# Altium PCB Satellite2.PcbDoc
Units mil, origin at the board's own origin, x right, y up, seen from the top; angles counter-clockwise.
Board outline 3725 x 3550 mil, 2 copper layers (Top Layer, Bottom Layer); 65 components, 69 nets, 239 pads, 118 vias.
Unrouted connection lines stored in the file: 15.
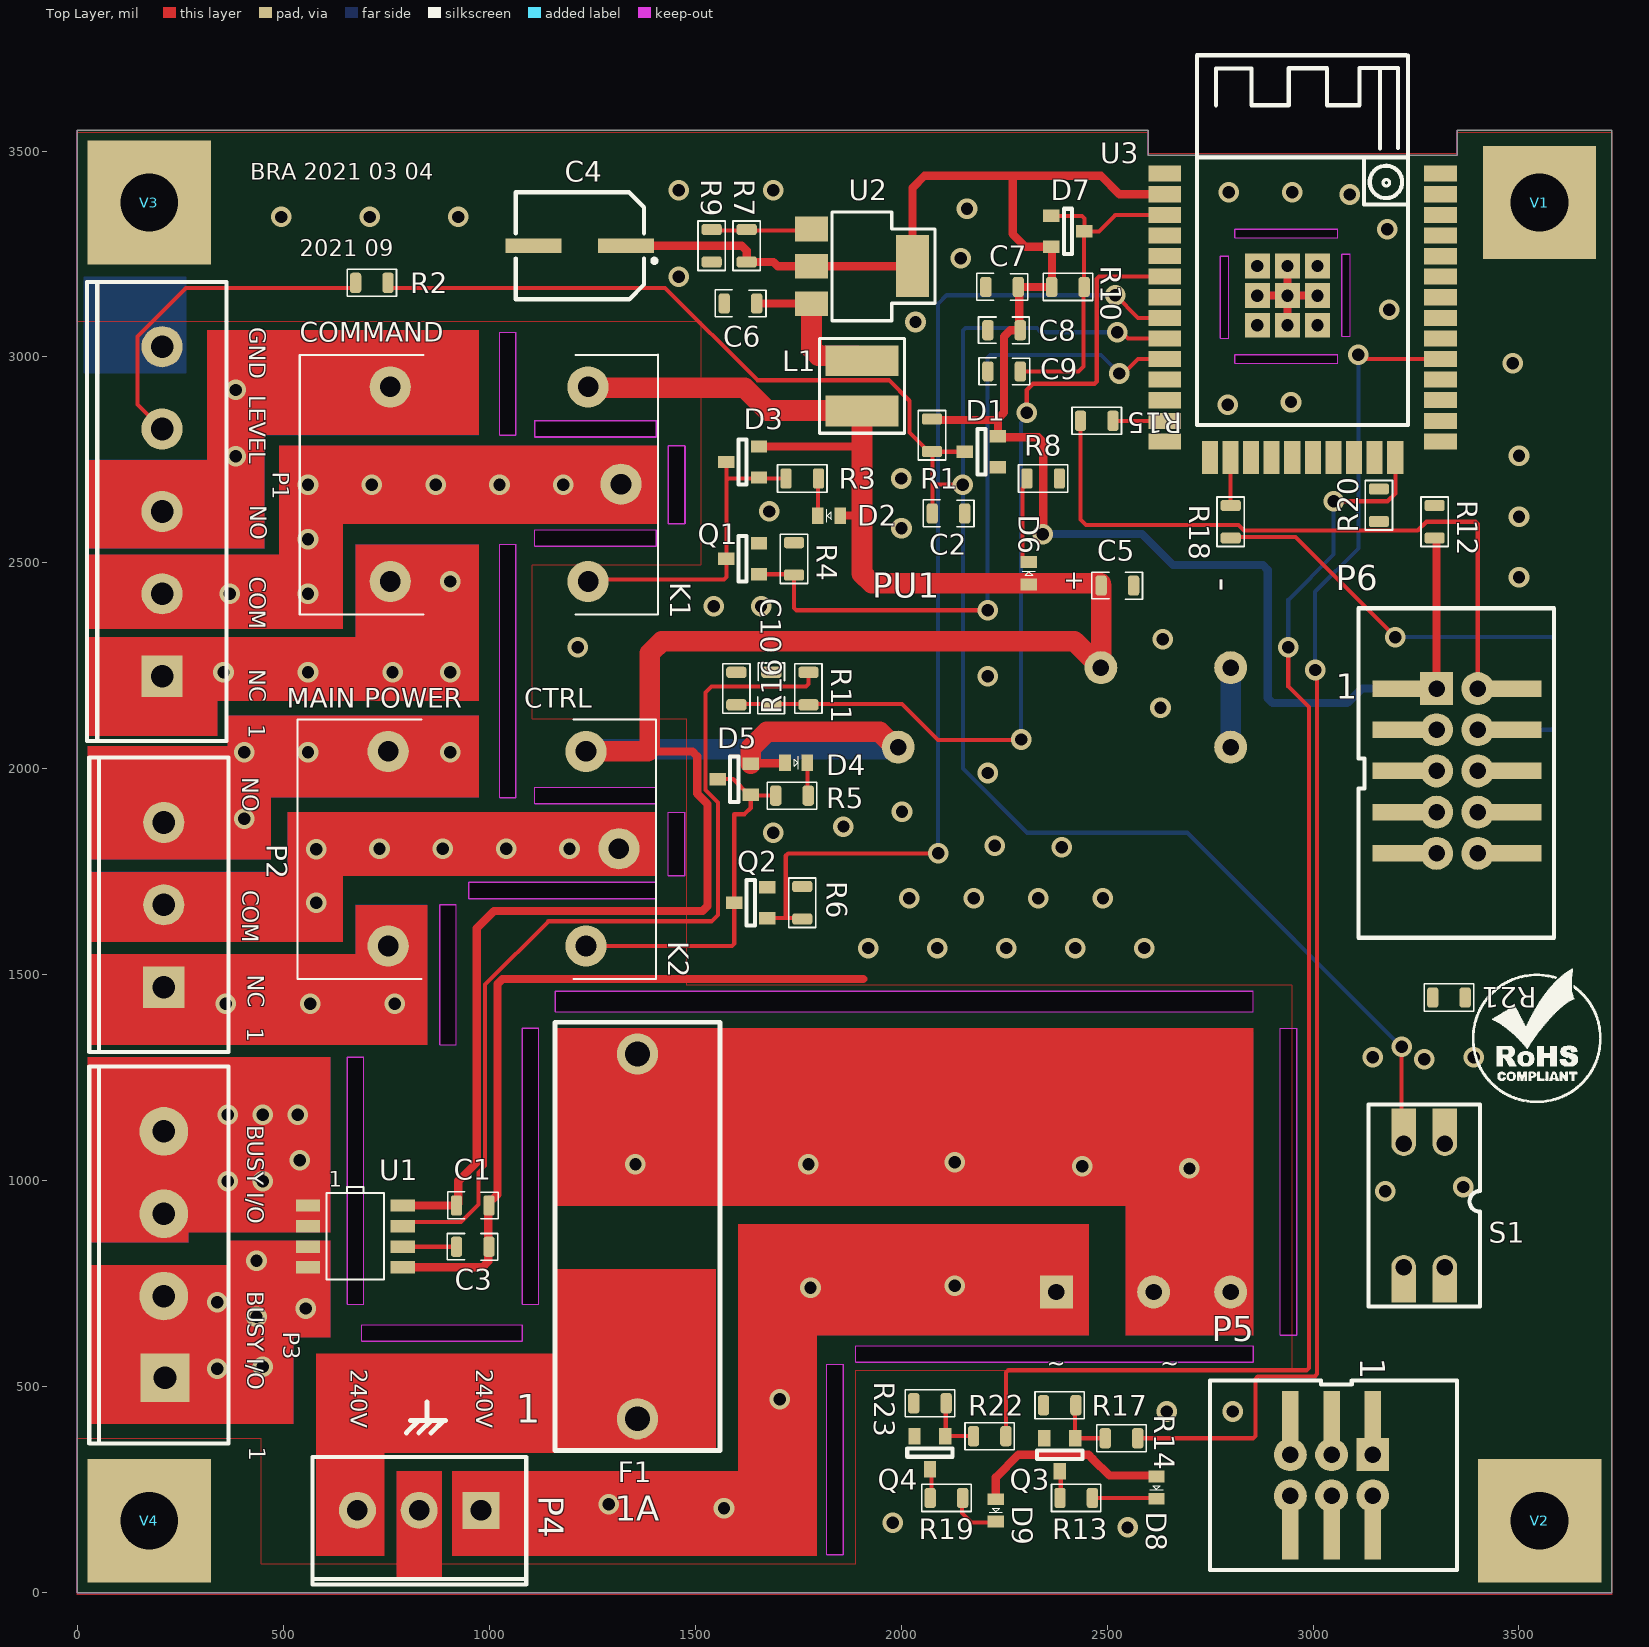
[diagram p0: Top Layer view]
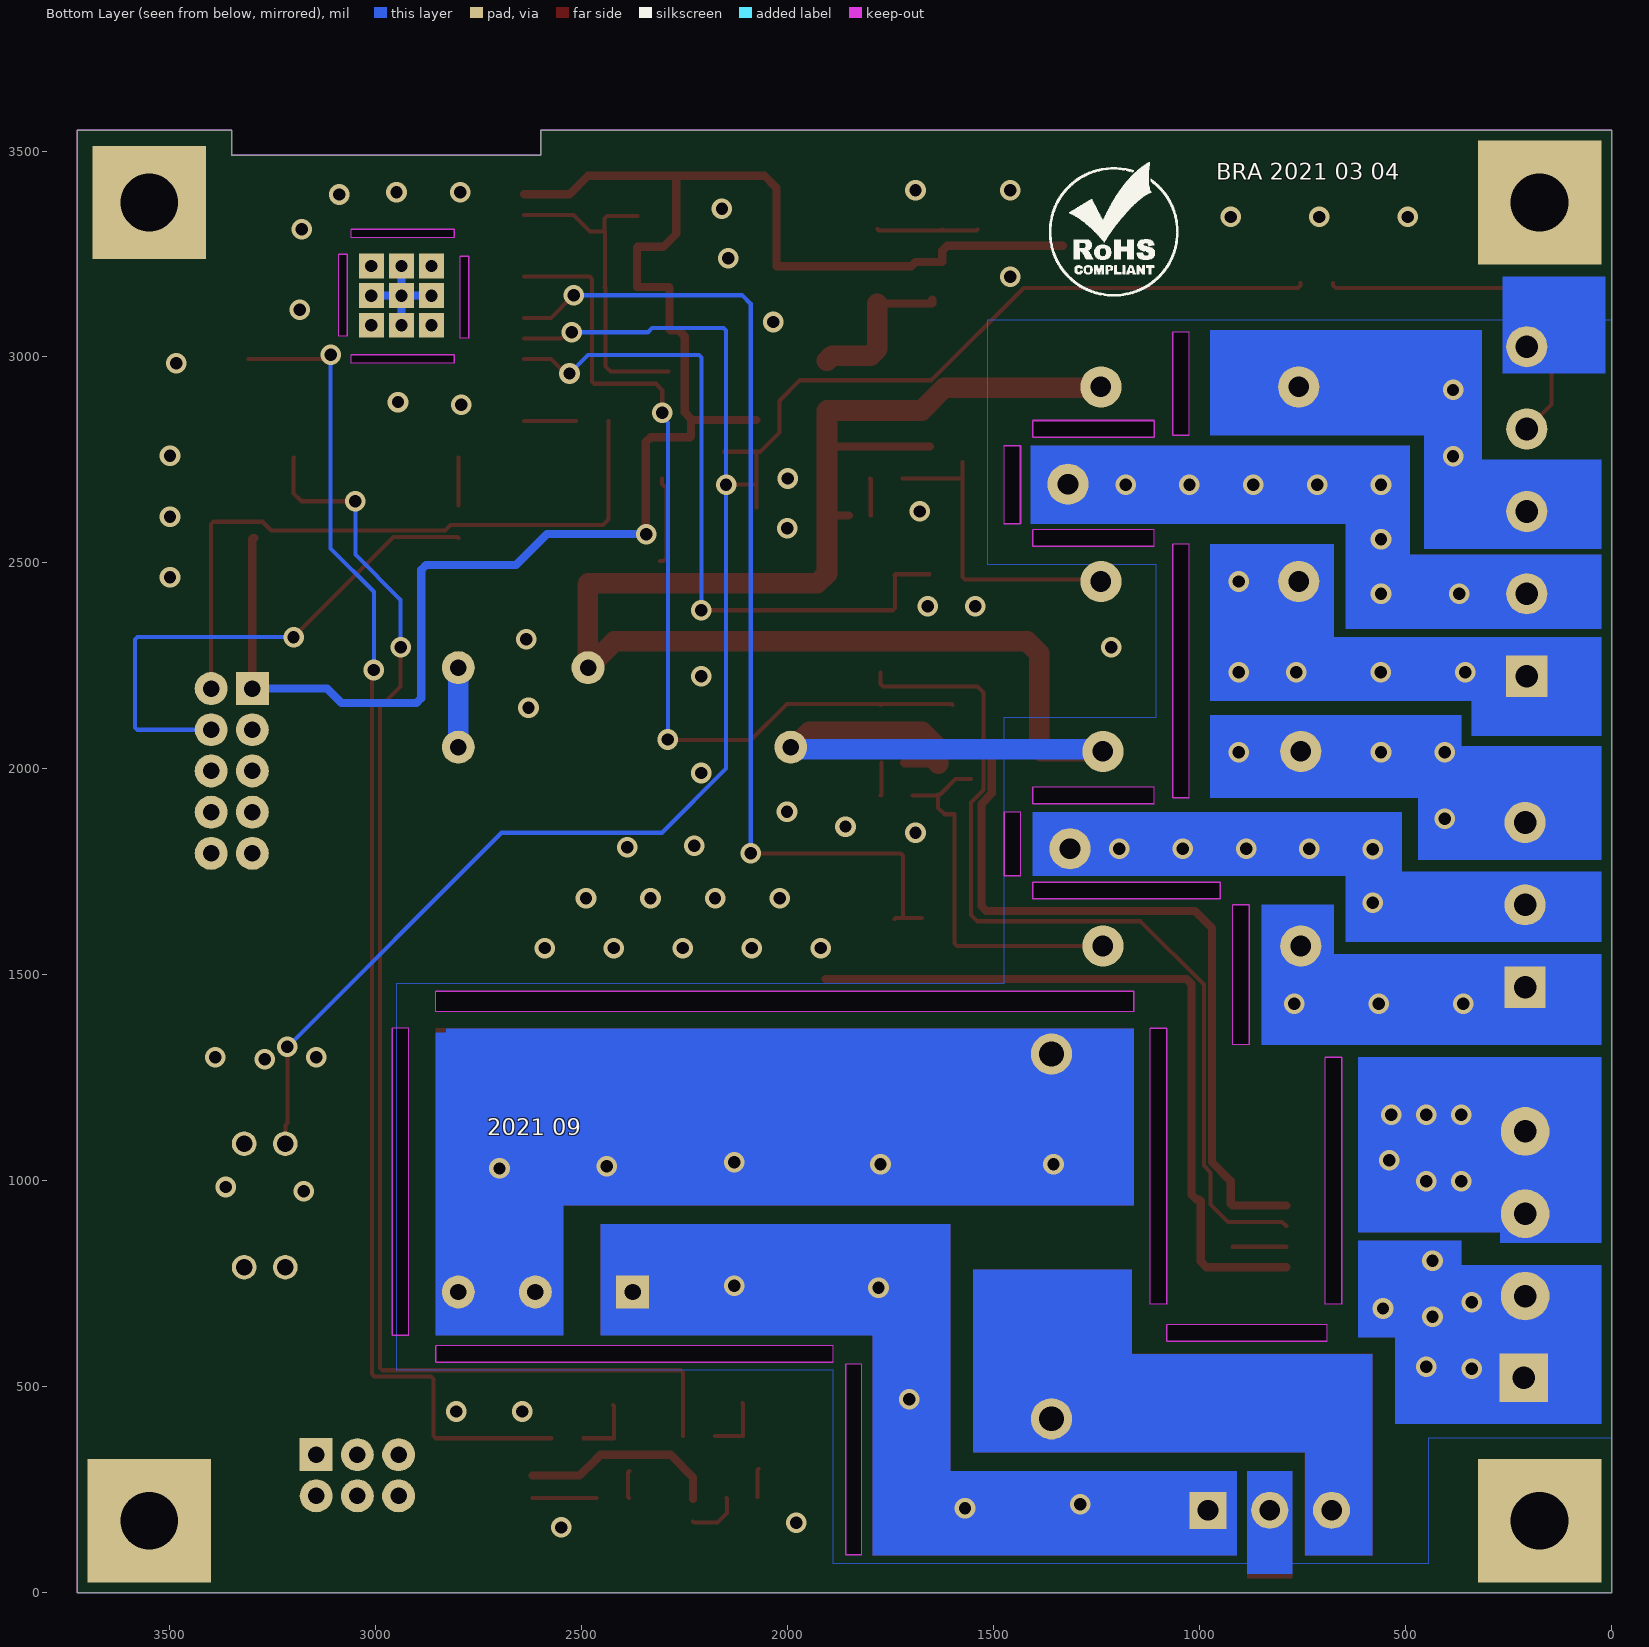
[diagram p1: Bottom Layer view, seen from below]
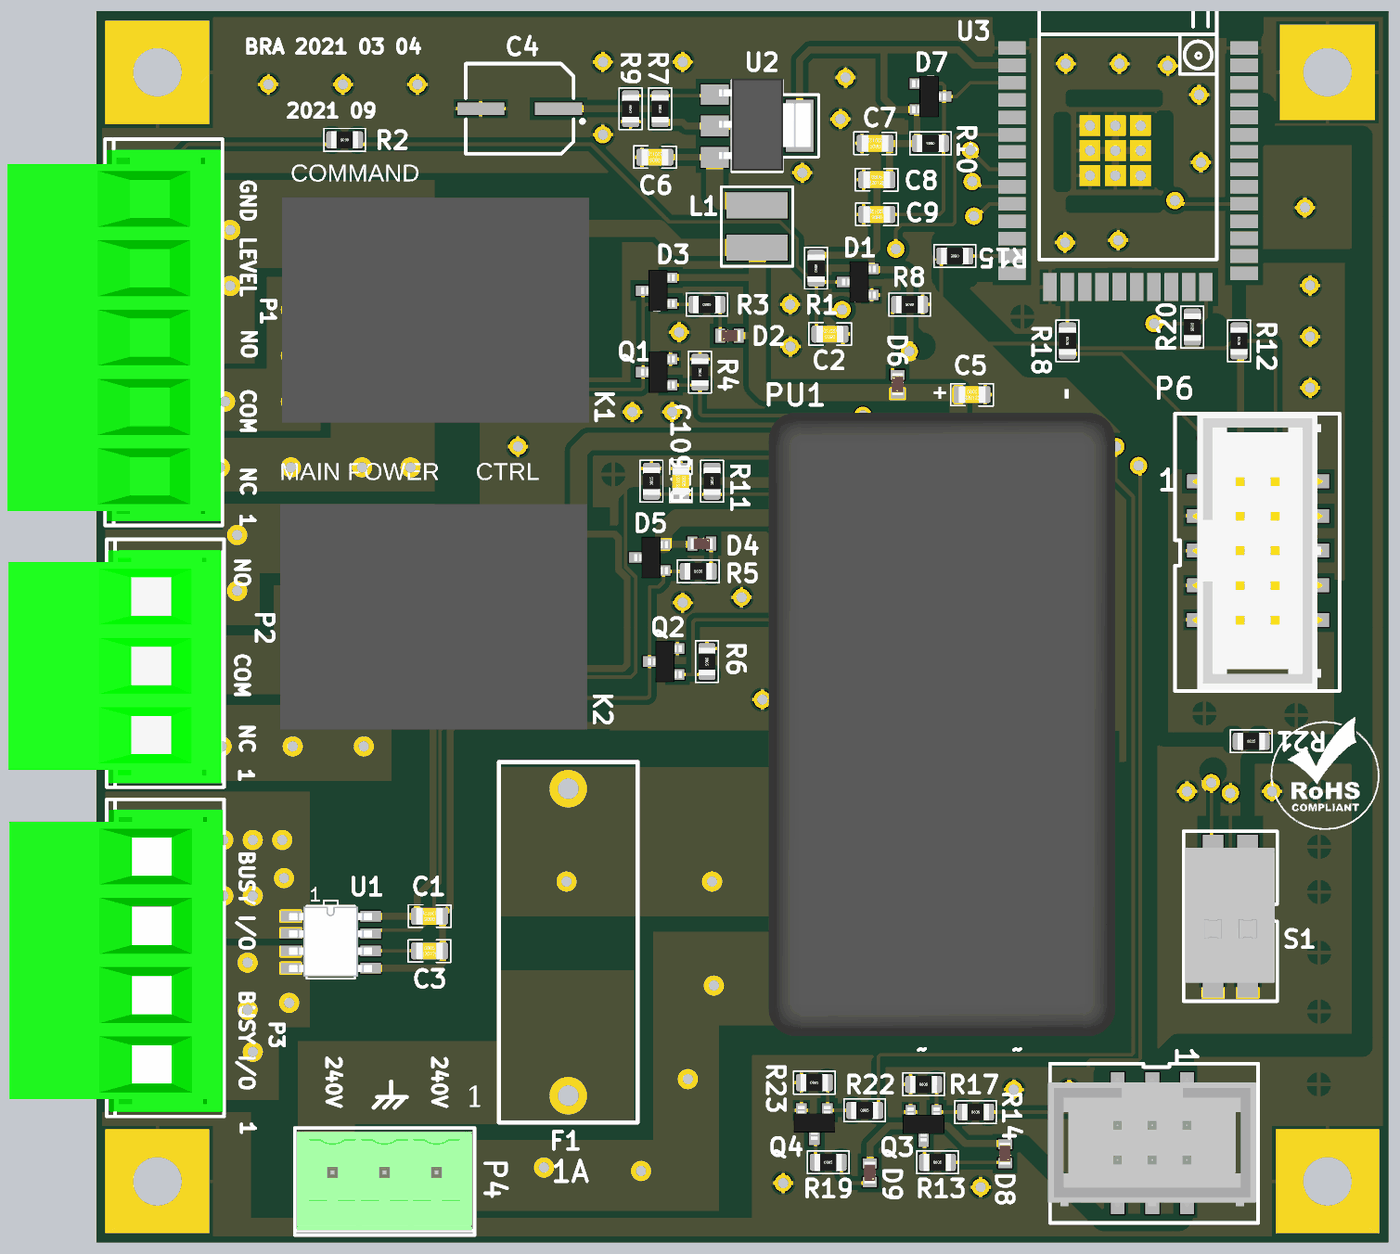
[diagram p2: 3D render of the assembled board from above, using the file's embedded part models]

## Layer stack, top to bottom
Top Solder: solder mask 0.4, Solder Resist, Dk 3.5
Top Layer: signal copper 1.4
Dielectric 1: dielectric 12.6, FR-4, Dk 4.8
Bottom Layer: signal copper 1.4
Bottom Solder: solder mask 0.4, Solder Resist, Dk 3.5

## Board outline
0,0 0,3550 2600,3550 2600,3490 3350,3490 3350,3550 3725,3550 3725,0
cut-out: 1160,1410 2855,1410 2855,1460 1160,1460
cut-out: 950,1685 1405,1685 1405,1725 950,1725
cut-out: 1475,1740 1435,1740 1435,1895 1475,1895
cut-out: 1405,1915 1110,1915 1110,1955 1405,1955
cut-out: 1065,1930 1025,1930 1025,2545 1065,2545
cut-out: 1405,2540 1110,2540 1110,2580 1405,2580
cut-out: 1435,2595 1475,2595 1475,2785 1435,2785
cut-out: 1405,2805 1110,2805 1110,2845 1405,2845
cut-out: 2810,2985 3060,2985 3060,3005 2810,3005
cut-out: 3070,3050 3090,3050 3090,3250 3070,3250
cut-out: 2810,3290 3060,3290 3060,3310 2810,3310
cut-out: 2775,3045 2795,3045 2795,3245 2775,3245
cut-out: 1110,2805 1405,2805 1405,2845 1110,2845
cut-out: 2960,625.17 2920,625.17 2920,1370 2960,1370
cut-out: 2855.17,560 1890,560 1890,600 2855.17,600
cut-out: 1860,92.42 1820,92.42 1820,555 1860,555
cut-out: 1405.17,2805.82 1110.17,2805.82 1110.17,2845.82 1405.17,2845.82
cut-out: 1405.17,2540.82 1110.17,2540.82 1110.17,2580.82 1405.17,2580.82
cut-out: 1065,1930 1025,1930 1025,2545 1065,2545
cut-out: 1475.85,2595 1435.85,2595 1435.85,2784.43 1475.85,2784.43
cut-out: 1065,2810.28 1025,2810.28 1025,3060 1065,3060
cut-out: 1405,1685 950,1685 950,1725 1405,1725
cut-out: 1405,1915 1110,1915 1110,1955 1405,1955
cut-out: 1475,1740 1435,1740 1435,1895 1475,1895
cut-out: 880,1330 920,1330 920,1670 880,1670
cut-out: 1080,700 1120,700 1120,1370 1080,1370
cut-out: 1080,610 690,610 690,650 1080,650
cut-out: 655,700 695,700 695,1300 655,1300

## Design rules (kind name [scope] priority, off if disabled: settings)
Clearance Clearance_3 [InNamedPolygon('NONET_L01_P000') Or InNamedPolygon('NONET_L02_P001')] p1: gap=15 ignorepadtopadclearanceinfootprint=TRUE
Clearance Clearance_1 [InNamedPolygon('NONET_L01_P000')] p2: gap=15 ignorepadtopadclearanceinfootprint=FALSE
Clearance [All] p3: gap=5 ignorepadtopadclearanceinfootprint=FALSE
HoleSize [All] p1: absolutevalues=TRUE maxlimit=140 minlimit=5 maxpercent=80.000 minpercent=20.000
PlaneClearance [All] p1: clearance=50
PolygonConnect PolygonConnect_1 [All vs IsNamedPolygon('NONET_L01_P000')] p1: connectstyle=Relief reliefconductorwidth=10 reliefentries=4 polygonreliefangle="90 Angle" airgapwidth=10
PolygonConnect [All] p2: connectstyle=Relief reliefconductorwidth=10 reliefentries=4 polygonreliefangle="90 Angle" airgapwidth=10
RoutingVias [All] p1: holewidth=28 width=60 viastyle="Through Hole" minholewidth=28 minwidth=50 maxholewidth=28 maxwidth=100
SilkToSolderMaskClearance [IsPad] p1: minsilkscreentomaskgap=5 clearancetoexposedcopper=TRUE
SolderMaskExpansion [All] p1: expansion=4 istentingtop=FALSE
UnRoutedNet [All] p1: checkbadconnections=TRUE
Width "Schematic Width Constraint_2" [InNet('GND')] p1: maxlimit=50 minlimit=10 preferedwidth=20
Width "Schematic Width Constraint_1" [InNet('VCC')] p2: maxlimit=50 minlimit=10 preferedwidth=20
Width "Schematic Width Constraint" [InNet('NetC6_1')] p3: maxlimit=50 minlimit=10 preferedwidth=20
Width "Schematic Width Constraint_3" [InNet('+5')] p4: maxlimit=50 minlimit=10 preferedwidth=20
Width [All] p5: maxlimit=20 minlimit=5 preferedwidth=10
26 further rules are at their usual default settings.

## Classes and differential pairs
component class U_PSU: C4 C5 C6 D6 F1 L1 P4 PU1 R7 R8 R9 U2
component class U_MCU: C7 C8 C9 C10 D7 D8 D9 P5 P6 Q3 Q4 R10 R11 R12 R13 R14 R15 R16 R17 R18 R19 R20 R21 R22 R23 S1 U3 V1 V2 V3 V4
component class U_IO: C1 C2 C3 D1 D2 D3 D4 D5 K1 K2 P1 P2 P3 Q1 Q2 R1 R2 R3 R4 R5 R6 U1

## Components (designator, comment, footprint, x,y, rotation, side; value= is the part's Value field where it differs from the comment)
C1 "100nF" "C 0805(2012)X0.65" 960,940 r180 top
C2 "100nF" "C 0805(2012)X0.65" 2115,2620 r180 top
C3 "1nF" "C 0805(2012)X0.65" 960,840 r0 top
C4 "100µF" KEMET_63 1220,3270 r180 top
C5 "10µF" "C 0805(2012)X0.65" 2525,2445 r0 top
C6 "10µF" "C 0805(2012)X0.65" 1610,3130 r180 top
C7 "10µF" "C 0805(2012)X0.65" 2245,3170 r180 top
C8 "100nF" "C 0805(2012)X0.65" 2250,3065 r0 top
C9 "1uF" "C 0805(2012)X0.65" 2250,2965 r180 top
C10 "100nF" "C 0805(2012)X0.65" 1685,2195 r270 top
D1 "BAT54S" SOT23 2195,2770 r270 top
D2 "RED" 0603-LEDR 1825,2615 r180 top
D3 "BAT54S" SOT23 1615,2745 r270 top
D4 "RED" 0603-LEDR 1745,2015 r0 top
D5 "BAT54S" SOT23 1595,1975 r270 top
D6 "RED" 0603-LEDR 2310,2475 r90 top
D7 "BAT54S" SOT23 2405,3305 r90 top
D8 "RED" 0603-LEDR 2620,255 r270 top
D9 "RED" 0603-LEDR 2230,200 r270 top
F1 "1A" FUS5X20 1360,865 r270 top
K1 "RELAY NAISJS" RELAIG5L 1240,2455 r180 top
K2 "RELAY NAISJS" RELAIG5L 1235,1570 r180 top
L1 "47µH" SELF4.5X4X3.2 1905,2930 r90 top
P1 "MACHINE" CO5P508-RIGHT 205,2225 r90 top
P2 "CTRL MAIN" "CO3P508 - 2" 210,1470 r270 top
P3 "BUSY" CO4P508 210,520 r270 top
P4 "220VAC" "CO3P381 - RIGHT" 980,200 r180 top
P5 "FTSH-103-02-F-DV" "HE10-6 TH-SMD" 3145,335 r270 top
P6 "FTSH-105-XX-X-DV" "HE10-10 TH-SMD" 3300,2195 r0 top
PU1 "IRM-05-5" IRM-05-X.X 2800,730 r90 top
Q1 "2N7002" SOT23 1615,2510 r270 top
Q2 "2N7002" SOT23 1635,1675 r270 top
Q3 "2N7002" SOT23 2385,335 r0 top
Q4 "2N7002" SOT23 2070,340 r0 top
R1 "56K" "R 0805(2012)" 2075,2810 r90 top
R2 "1K" "R 0805(2012)" 715,3180 r180 top
R3 "150" "R 0805(2012)" 1760,2705 r0 top
R4 "56K" "R 0805(2012)" 1740,2510 r270 top
R5 "150" "R 0805(2012)" 1735,1935 r0 top
R6 "56K" "R 0805(2012)" 1760,1675 r270 top
R7 "1.5K" "R 0805(2012)" 1625,3270 r270 top
R8 "150" "R 0805(2012)" 2345,2705 r180 top
R9 "2.2K" "R 0805(2012)" 1540,3270 r90 top
R10 "10K" "R 0805(2012)" 2405,3170 r180 top
R11 "12K" "R 0805(2012)" 1775,2195 r90 top
R12 "10K" "R 0805(2012)" 3295,2600 r270 top
R13 "150" "R 0805(2012)" 2425,230 r0 top
R14 "1K" "R 0805(2012)" 2535,375 r0 top
R15 "0R" "R 0805(2012)" 2475,2845 r180 top
R16 "22K" "R 0805(2012)" 1600,2195 r90 top
R17 "56K" "R 0805(2012)" 2385,455 r0 top
R18 "0R" "R 0805(2012)" 2800,2600 r270 top
R19 "150" "R 0805(2012)" 2110,230 r0 top
R20 "0R" "R 0805(2012)" 3160,2640 r270 top
R21 "0R" "R 0805(2012)" 3330,1445 r0 top
R22 "1K" "R 0805(2012)" 2215,380 r0 top
R23 "56K" "R 0805(2012)" 2070,460 r0 top
S1 "SW DIP-2" "DIP SWITCH 2 POS" 3320,1090 r270 top
U1 "ACS712" SOIC8 675,865 r0 top
U2 "LM1117 ADJ" SOT223 1905,3220 r270 top
U3 "ESP32-WROOM-32" ESP32-WROOM-32X 2640,3445 r0 top
V1 "VIS" "HOLE M4"#1 3545,3370 r0 top
V2 "VIS" "HOLE M4"#2 3530,280 r0 top
V3 "VIS" "HOLE M4"#3 245,3270 r0 top
V4 "VIS" "HOLE M4"#4 220,190 r0 top

## Footprints (in the part's own frame and the unit in brackets; to place one, negate y for a bottom-side part, rotate by r counter-clockwise, add the part's x,y. Pads: shape width x height; smd on the part's side, far side on the other; paste and mask are expansions set on the pad)
0603-LEDR [mm]
  rect 0.725x1.016 smd paste+0 mask+0.12: 1(-0.69,0) 2(0.69,0)
  silkscreen extent -0.13,-0.4 0.13,0.4, body extent -0.8,-0.4 0.8,0.4, height 0.69
"C 0805(2012)X0.65" [mm]
  rrect50% 0.7x1.25 smd: 1(-1,0) 2(1,0)
  silkscreen extent -1.57,-0.84 1.55,0.81, body extent -1,-0.62 1,0.63, height 0.66
"CO3P381 - RIGHT" [mil] "Connecteur Phoenix 1803280"
  rect 90x90 hole 50: 1(0,0)
  round 90 hole 50 mask+4: 2(150,0) 3(300,0)
  silkscreen extent -110,-129 409,180, body extent -102,-119 402,166, height 362
"CO3P508 - 2" [mil]
  rect 100x100 hole 55 mask+3: 1(0,0)
  round 100 hole 55 mask+3: 2(-200,0) 3(-400,0)
  silkscreen extent -557,-181 157,157, body extent -526,-464 146,152, height 879
CO4P508 [mm]
  rect 3x3 hole 1.397 mask+0.076: 1(-0.051,0.076)
  round 3 hole 1.397 mask+0.076: 2(-5.08,0) 3(-10.16,0) 4(-15.24,0)
  silkscreen extent -19.24,-4.6 4,4, body extent -18.49,-11.74 3.65,3.91, height 22.32
CO5P508-RIGHT [mil]
  rect 100x100 hole 55 mask+3: 1(0,-1)
  round 100 hole 55 mask+3: 2(200,-1) 3(400,-1) 5(800,-1)
  round 100 hole 55 mask+4: 4(600,-1)
  silkscreen extent -157,-157 957,181, body extent -146,-153 926,463, height 862
"DIP SWITCH 2 POS" [mil]
  rect 80x60 smd: 1(-45,0) 2(-45,-100) 3(345,-100) 4(345,0)
  round 60 hole 40 mask+0: 1(0,0) 2(0,-100) 3(300,-100) 4(300,0)
  silkscreen extent -95,-185 395,85, body extent -48,-179 342,78, height 268
ESP32-WROOM-32X [mil] "PCB-WROOM-32U"
  rect 80x39 smd mask+0: 1(0,0) 2(0,-50) 3(0,-100) 4(0,-150) 5(0,-200) 6(0,-250) 7(0,-300) 8(0,-350) 9(0,-400) 10(0,-450) 11(0,-500) 12(0,-550) 13(0,-600) 14(0,-650) 25(669.29,-650) 26(669.29,-600) 27(669.29,-549.21) 28(669.29,-500) 29(669.29,-450) 30(669.29,-400) 31(669.29,-350) 32(669.29,-300) 33(669.29,-250) 35(669.29,-150) 36(669.29,-100) 37(669.29,-50) 38(669.29,0)
  rect 39x80 smd mask+0: 15(109.65,-689.37) 16(159.65,-689.37) 17(209.65,-689.37) 18(259.65,-689.37) 19(309.65,-689) 20(359.65,-689.37) 21(409.65,-689.37) 22(459.65,-689.37) 23(509.65,-689.37) 24(559.65,-689.37)
  rect 80x40 smd mask+0: 34(669.29,-200)
  rect 60x60 hole 30 paste+50 mask+0: 39(225,-368) 39(225,-296) 39(225,-224) 39(298,-368) 39(298,-296) 39(298,-224) 39(371,-296) 39(371,-224)
  rect 60x60 hole 30 paste+3 mask+0: 39(371,-368)
  silkscreen extent 79,-610 591,287, body extent -19,-709 690,295, height 122
FUS5X20 [mil]
  round 100 hole 60 mask+4: 1(-442.9,0) 2(442.9,0)
  silkscreen extent -520,-200 520,200, body extent -495,-195 495,195, height 472
"HE10-6 TH-SMD" [mil] "Connecteur Harwin_M20-877342"
  rect 150x40 smd: 1(-80,0) 2(180,0) 3(-80,-100) 4(180,-100) 5(-80,-200) 6(180,-200)
  rect 80x80 hole 40: 1(0,0)
  round 80 hole 40: 2(100,0) 3(0,-100) 4(100,-100) 5(0,-200) 6(100,-200)
  silkscreen extent -180,-395 280,205, body extent -139,-401 235,200, height 422
"HE10-10 TH-SMD" [mil]
  rect 150x40 smd: 1(-80,0) 2(180,0) 3(-80,-100) 4(180,-100) 5(-80,-200) 6(180,-200) 7(-80,-300) 8(180,-300) 9(-80,-400) 10(180,-400)
  rect 80x80 hole 40 mask+0: 1(0,0)
  round 80 hole 40 mask+0: 2(100,0) 3(0,-100) 4(100,-100) 5(0,-200) 6(100,-200) 7(0,-300) 8(100,-300) 9(0,-400) 10(100,-400)
  silkscreen extent -190,-605 285,195, body extent -139,-601 235,200, height 425
"HOLE M4"#1 [mil] "TROU DE FIXATION M4"
  rect 275x275 hole 140 mask+0: 1(5,5)
"HOLE M4"#2 [mil] "TROU DE FIXATION M4"
  rect 300x300 hole 140 mask+0: 1(20,-105)
"HOLE M4"#3 [mil] "TROU DE FIXATION M4"
  rect 300x300 hole 140 mask+0: 1(-70,105)
"HOLE M4"#4 [mil] "TROU DE FIXATION M4"
  rect 300x300 hole 140 mask+0: 1(-45,-15)
IRM-05-X.X [mil]
  rect 80x80 hole 40: 1(0,423.23)
  round 80 hole 40: 2(0,187) 2(0,0) 3(1322.83,0) 3(1515.75,0) 4(1322.83,807.09) 4(1515.75,314.96)
  body extent -136,-138 1663,862, height 846
KEMET_63 [mm] "Precision Wire Wound Inductor, 2-Leads, Body 7,7x6,5mm, IPC Medium Density"
  rect 3.45x0.9 smd: 1(-2.85,0) 2(2.85,0)
  silkscreen extent -4.73,-3.43 3.95,3.3, body extent -4.4,-3.4 4.4,3.4, height 8.7
"R 0805(2012)" [mm]
  rrect50% 0.7x1.25 smd: 1(-1,0) 2(1,0)
  silkscreen extent -1.52,-0.84 1.52,0.84, body extent -1,-0.62 1,0.63, height 0.6
RELAIG5L [mil]
  round 100 hole 50 mask+4: 1(-79.9,-236.2) 2(0,-472.4) 3(480.3,-472.4) 4(480.3,0) 5(0,0)
  silkscreen extent -170,-550 700,80, body extent -180,-559 706,91, height 748
SELF4.5X4X3.2 [mm] "SELF 4.5 X 4 X 3.2"
  rect 1.9x4.5 smd: 1(-1.549,0) 2(1.549,0)
  silkscreen extent -2.92,-2.62 2.92,2.62, body extent -2.5,-2.25 2.5,2.25, height 3.31
SOIC8 [mil]
  rect 59.1x30.3 smd: 1(-115,75) 2(-115,25) 3(-115,-25) 4(-115,-75) 5(115,-75) 6(115,-25) 7(115,25) 8(115,75)
  silkscreen extent -70,-105 70,120, body extent -120,-100 119,103, height 69
SOT23 [mil]
  rect 30x40 smd: 1(37.5,40) 2(-37.5,40) 3(0,-40)
  silkscreen extent -55,-10 55,10, body extent -60,-45 60,53, height 47
SOT223 [mil]
  rect 60x80 smd: 1(-90.6,-122.5) 2(0,-122.5) 3(90.6,-122.5)
  rect 150x80 smd: 4(-0.6,122.5)
  silkscreen extent -132,-73 132,178, body extent -137,-111 129,154, height 73

## Part data
C1 C2 C8 C10: library part "Cap 0805 100nF", "Capacitor", Manufacturer=MULTICOMP, Manufacturer Part Number=MCCA000296, Supplier Part Number 1=1759167, ComponentLink1Description=http://www.farnell.com/datasheets/1520827.pdf, ComponentLink1URL=http://www.farnell.com/datasheets/1520827.pdf, Pricing 1="100=0,01, 500=0,008, 1000=0,006, 4000=0,005 (EUR)", Supplier 1=Farnell
C3: library part "Cap 0805 1nF", "Capacitor", Manufacturer=SAMSUNG, Manufacturer Part Number=CL05B102KB5NNNC, Température de travail=-55...125°C, Boîtier=0402, Capacité=1nF, Category="Condensateurs MLCC SMD 0402", ComponentLink1Description=http://www.tme.eu/fr/details/cl05b102kb5nnnc/condensateurs-mlcc-smd-0402/samsung/, ComponentLink1URL=http://www.tme.eu/fr/details/cl05b102kb5nnnc/condensateurs-mlcc-smd-0402/samsung/, Diélectrique=X7R, Fabricant=SAMSUNG, MinAmount=300, Montage=SMD, Multiples=100, Price Type=NET, Pricing 1="300=0,00208, 1000=0,00124, 10000=0,00069, 40000=0,00066, 100000=0,00064 (EUR)", Stock 1=25000, SuppliedAmount=10000, Supplier 1=TME, Supplier Part Number 1=CL05B102KB5NNNC, Tension de travail=50V, Tolérance=±10%, Tye de condensateur=MLCC, Type de condensateur=céramique, Unit=pcs, Weight=0,012
C4: library part "Cap Pol 100µF - 16", "SMD Polarized Capacitor 16V", Capacité=100, Durée de vie @ température="2000 heures @ 105", Manufacturer=EPCOS, Manufacturer Part Number=B41142A4107M, Supplier Part Number 1=1735328, Température de fonctionnement="-55°C à +105", Température de fonctionnement max..=105, Température, ESR=20, Température d'utilisation min=-55, Tolérance de capacité="± 20%", ComponentLink1Description=http://www.epcos.com/inf/20/30/db/alu_x/B41142.pdf, ComponentLink1URL=http://www.epcos.com/inf/20/30/db/alu_x/B41142.pdf, Courant d'ondulation c.a.=300, Courant d'ondulation c.a. à  100Hz=300, Diamètre=6.3, Fréquence, impédance=100, Hauteur=7.7, Impédance=0.26, Longueur/hauteur=7.7, Pricing 1="10=0,123, 50=0,095, 100=0,078, 250=0,07, 1000=0,062 (EUR)", Product Range="EPCOS - B41142 Series", RoHS=YES, Résistance, ESR=0.16, Supplier 1=Farnell, SVHC="No SVHC (19-Dec-2012)", Température, courant ondulatoire=105, Température, impédance=20, Tension=16, Type de boîtier=CMS, Type de boîtier de condensateur="Radial Can - SMD", Type de packaging="Cut Tape"
C5 C6: library part "Cap 0805 10µF", "Capacitor non polarized 10µF SMD 0805", Capacitance=10uF, Case Code (Imperial)=0805, Case Code (Metric)=2012, Dielectric=X7R, Max Operating Temperature=85°C, Min Operating Temperature=-55°C, Package Quantity=1, Supplier Part Number 1=CL21A106KOQNNNE, Tolerance=10%, Voltage=16V, Case/Package=0805, ComponentLink1Description=http://www.tme.eu/en/details/cc0805kkx5r5106/0805-mlcc-smd-capacitors/yageo/cc0805kkx5r5bb106/, ComponentLink1URL=http://www.tme.eu/en/details/cc0805kkx5r5106/0805-mlcc-smd-capacitors/yageo/cc0805kkx5r5bb106/, Depth=1.25mm, Height=1.25mm, Lead Free="Lead Free", Length=2mm, Mount="Surface Mount", Packaging="Tape and Reel", Radiation Hardening=No, Supplier 1=TME, Thickness=0.055inch, Voltage Rating=16V, Voltage Rating (DC)=16V, Width=0.049inch
C7: library part "Cap 0805 10uF", "Capacitor non polarized 10µF SMD 0805", Capacitance=10uF, Case Code (Imperial)=0805, Case Code (Metric)=2012, Dielectric=X7R, Max Operating Temperature=85°C, Min Operating Temperature=-55°C, Package Quantity=1, Supplier Part Number 1=CL21A106KOQNNNE, Tolerance=10%, Voltage=16V, Case/Package=0805, ComponentLink1Description=http://www.tme.eu/en/details/cc0805kkx5r5106/0805-mlcc-smd-capacitors/yageo/cc0805kkx5r5bb106/, ComponentLink1URL=http://www.tme.eu/en/details/cc0805kkx5r5106/0805-mlcc-smd-capacitors/yageo/cc0805kkx5r5bb106/, Depth=1.25mm, Height=1.25mm, Lead Free="Lead Free", Length=2mm, Mount="Surface Mount", Packaging="Tape and Reel", Radiation Hardening=No, Supplier 1=TME, Thickness=0.055inch, Voltage Rating=16V, Voltage Rating (DC)=16V, Width=0.049inch
C9: library part "Cap 0805 1uF", "Capacitor", Capacitor Terminals=SMD, Capacité=1, Manufacturer=MULTICOMP, Manufacturer Part Number=MCCA000549, Supplier Part Number 1=1759429, Température de fonctionnement="-30°C à +85", Tolérance de capacité="+80%, -20%", ComponentLink1Description=http://www.farnell.com/datasheets/1723208.pdf, ComponentLink1URL=http://www.farnell.com/datasheets/1723208.pdf, Diélectrique=Y5, Pricing 1="100=0,018, 500=0,012, 1000=0,009, 3000=0,006 (EUR)", Product Range="MULTICOMP - MCCA Series", RoHS=YES, Supplier 1=Farnell, SVHC="No SVHC (20-Jun-2013)", Type de boîtier de condensateur="0805 [2012 Metric]", Type de packaging="Cut Tape"
D1 D3 D5 D7: "Schottky Barrier Double Diode", Manufacturer=MULTICOMP, Supplier Part Number 1=1621835, Temps trr max.=5, Température de fonctionnement="-55°C à +150", Température de fonctionnement max..=150, Température d'utilisation min=-55, ComponentLink1Description=http://www.farnell.com/datasheets/1317753.pdf, ComponentLink1URL=http://www.farnell.com/datasheets/1317753.pdf, Configuration diode="Dual Series", courant Ifsm=600, Courant, If moy.=200, Courant, If, Vf=10, Courant, Ifs max.=600, Courant, Ir, max..=2, Diode Type=Schottky, Manufacturer Part Number=BAT54S, Marquage, CMS=L44, Nombre de broches=3, Pricing 1="10=0,102, 250=0,074, 1000=0,06, 3000=0,053 (EUR)", RoHS=YES, Stock 1=52055, Supplier 1=Farnell, SVHC="No SVHC (19-Dec-2012)", Température, Tj max..=150, Tension, Vf max..=400, Tension, Vrrm=30, Type de boîtier=SOT-23, Type de boîtier diode=SOT-23, Type de terminaison=SMD
D2 D4 D6 D8 D9: library part HSMH-C190, "Surface Mount Chip LED, Red", Manufacturer="AVAGO TECHNOLOGIES", Manufacturer Part Number=HSMH-C190., Supplier Part Number 1=8554641, Température de fonctionnement="-30°C à +85", Température de fonctionnement max..=85, Température d'utilisation min=-30, Angle, vision=170°, ComponentLink1Description=http://www.farnell.com/datasheets/313031.pdf, ComponentLink1URL=http://www.farnell.com/datasheets/313031.pdf, ComponentLink2Description=http://www.farnell.com/datasheets/55927.pdf, ComponentLink2URL=http://www.farnell.com/datasheets/55927.pdf, Couleur=RED, Couleur de LED=Rouge, Couleur, LED=Rouge, Courant, direct, If=20, Dissipation de puissance=65, Forme de lentille=Rectangulaire, Intensité lumineuse=17, Intensité lumineuse min. à  If=2.8, Intensité lumineuse typique=10, Largeur (externe)=0.8, Longueur d'onde dominante=639, Longueur d'onde typ.=626, Longueur d'onde, crête=630, Longueur/hauteur=1.6, Matière=AlGaAs, Montage LED=CMS, MSL="MSL 2A - 4 semaines", Nombre de broches=2, Orientation de montage opto=Dessus, Orientation sortie de lumière="Top Emitting", Pricing 1="5=0,06, 25=0,059, 100=0,057, 250=0,052, 500=0,047 (EUR)", Profondeur=0.8, RoHS=YES, Supplier 1=Farnell, SVHC="No SVHC (19-Dec-2012)", Taille de lampe="0.8mm x 1", Température, stockage max..=85, Température, stockage min.=-40, Tension, direct à  If=1.8, Tension, Vf max..=2.6, Tension, Vf min.=2.1, Tension, Vf typ.=1.8, Type de LED=Standard
F1: library part "Fuse holder SMD 5X20", "Fuse holder 5x20 SMD", Fuse Current=10, Manufacturer="LITTELFUSE WICKMANN", Manufacturer Part Number=65800001009, Supplier Part Number 1=1716677, Voltage Rating VAC=250, Fuse Holder Type="Cartridge Fuse Holder", Fuse Size Held="5mm x 20", Holder Terminals="Solder Lug", No. of Fuses=1, Pricing 1="1=1,39, 10=1,31, 100=1,25, 250=1,19, 500=1,12, 1000=1,05 (EUR)", RoHS=YES, Supplier 1=Farnell, Voltage Rating VDC=250
K1 K2: Manufacturer="OMRON ELECTRONIC COMPONENTS", Manufacturer Part Number=G5LA1A412DC, Supplier Part Number 1=2213790, ComponentLink1Description=http://www.farnell.com/datasheets/1648381.pdf, ComponentLink1URL=http://www.farnell.com/datasheets/1648381.pdf, Configuration des contacts=SPST-NO, Courant de bobine=30, Courant de contact max..=10, Hauteur, dimension externe=15.8, Largeur (externe)=15.8, Montage relais=Traversant, Pricing 1="1=0,84, 10=0,74, 50=0,66, 100=0,59, 250=0,54 (EUR)", Profondeur=19.8, Puissance de fonctionnement nominale=360, RoHS=YES, Résistance, bobine=400, Supplier 1=Farnell, SVHC="No SVHC (20-Jun-2013)", Tension AC nominale du contact=250, Tension DC nominale du contact=24, Tension, bobine c.c. nom.=12, Type de bobine=CC, Type de relais=Puissance
L1: library part SELF, DC Resistance Max=0.14, Inductance=47, Inductance Tolerance="± 20%", Inductor Construction=Unshielded, Manufacturer=COILCRAFT, Manufacturer Part Number=DO3316P-473MLD, Power Inductor Case="12.95mm x 9.4mm x 5.21", RMS Current (Irms)=1.8, Saturation Current (Isat)=1.6, Self Resonant Frequency Min="12MHz<!--FANDB--><div class=\"features-and-benefits-container\"><div class=\"features-and-benefits-description\"><span class=\"features-benefits-value\">The DO3316P-473MLD is a surface mount unshielded Power Inductor with ferrite core. This inductor features gold over nickel over phosphor bronze terminations and is resistance to soldering heat maximum three 40 seconds reflows at +260°C, parts cooled to room temperature between cycles. This inductor also features moisture sensitivity level (MSL) of 1, failures in time (FIT)/mean time between failures (MTBF) is 38 per billion hours/26,315,789 hours, calculated per Telcordia SR-332 and only pure water or alcohol recommended for wash. Current at 25°C causes an inductance drop of 10% typical from its value without current. ±20", Supplier Part Number 1=2287252, ComponentLink1Description=http://www.farnell.com/datasheets/1681904.pdf, ComponentLink1URL=http://www.farnell.com/datasheets/1681904.pdf, Packaging="Cut Tape", Pricing 1="1=0.981, 500=0.722 (GBP)", Product Range=DO3316, RoHS=YES, Stock 1=2601, Supplier 1=Farnell, SVHC="No SVHC (12-Jan-2017)"
P1: library part "Header 5", "Header, 5-Pin", LatestRevisionDate=17-Jul-2002, LatestRevisionNote="Re-released for DXP Platform.", Publisher="Altium Limited"
P2 P4: library part "Header 3", "Header, 3-Pin", LatestRevisionDate=17-Jul-2002, LatestRevisionNote="Re-released for DXP Platform.", Publisher="Altium Limited"
P3: library part "Header 4", "Header, 4-Pin", LatestRevisionDate=17-Jul-2002, LatestRevisionNote="Re-released for DXP Platform.", Publisher="Altium Limited"
P5: "Connector Header Surface Mount 6 position 0.050 (1.27mm)", Package=None, Availability=Unavailable, MF=Samtec, MP=FTSH-103-02-F-DV, Price=None
P6: "Connector Header Surface Mount 10 position 0.050 (1.27mm)", Package=None, Availability=Bad, Check_prices=https://www.snapeda.com/parts/FTSH-105-01-L-DV/Samtec/view-part/4795786/?ref=eda, MF=Samtec, MP=FTSH-105-01-L-DV, Price=None, Purchase-URL=https://pricing.snapeda.com/search/part/FTSH-105-01-L-DV/?ref=eda, SnapEDA_Link=https://www.snapeda.com/parts/FTSH-105-01-L-DV/Samtec/view-part/4795786/?ref=snap
PU1: "POWER SUPPLY 5V 1A"
Q1 Q2 Q3 Q4: "N-channel Enhancement Mode Field-effect Transistor", Manufacturer="FAIRCHILD SEMICONDUCTOR", Supplier Part Number 1=9845313, ComponentLink1Description=http://www.farnell.com/datasheets/660093.pdf, ComponentLink1URL=http://www.farnell.com/datasheets/660093.pdf, ComponentLink2Description=http://www.farnell.com/datasheets/410597.pdf, ComponentLink2URL=http://www.farnell.com/datasheets/410597.pdf, Manufacturer Part Number=2N7002, Pricing 1="5=0,138, 25=0,13, 100=0,059, 1000=0,049, 3000=0,026, 6000=0,0234 (EUR)", RoHS=YES, Supplier 1=Farnell
R1: library part "Resistor 0805 56K", "Resistor SMD 0805 56K", Coefficient de température="± 100", Manufacturer=MULTICOMP, Manufacturer Part Number=MC0.1W08051%56KFR, Resistor Mounting=CMS, Resistor Terminals="(Non Disponible)", Supplier Part Number 1=2129258, ComponentLink1Description=http://www.farnell.com/datasheets/1716700.pdf, ComponentLink1URL=http://www.farnell.com/datasheets/1716700.pdf, MSL="(Non Applicable)", Pricing 1="5000=0,001 (EUR)", Product Range="MULTICOMP - MC Series", Puissance=100, RoHS=YES, Résistance=56, Supplier 1=Farnell, Tension=150, Tolérance de résistance="± 1%", Type de boîtier de résistance=0805, Type de packaging="Full Reel", Type de résistance="Couche épaisse"
R2 R14 R22: library part "Resistor 0805 1K", "Resistor SMD 0805 1K", Coefficient de température="± 100", Manufacturer=MULTICOMP, Manufacturer Part Number=MC0.1W08051%1KFR, Resistor Mounting=CMS, Supplier Part Number 1=2129113, ComponentLink1Description=http://www.farnell.com/datasheets/1716700.pdf, ComponentLink1URL=http://www.farnell.com/datasheets/1716700.pdf, MSL="MSL 1 - Illimité", Pricing 1="5000=0,001 (EUR)", Product Range="MULTICOMP - MC Series", Puissance=100, RoHS=YES, Résistance=1, Supplier 1=Farnell, Tension=150, Tolérance de résistance="± 1%", Type de boîtier de résistance=0805, Type de packaging="Full Reel", Type de résistance="Couche épaisse"
R3 R5 R8 R13 R19: library part "Resistor 0805 150", "Resistor SMD 0805 150", Case=0805, Manufacturer=YAGEO, Manufacturer Part Number=RC0805JR-07150KL, Max. operating voltage=150V, Max. overload voltage=300V, Operating temperature=-55...155°C, Power=0.125W, Resistance=150kΩ, Resistor type="thick film", Supplier Part Number 1=RC0805JR-07150K, Tolerance=±5%, Category="0805 SMD Resistors", ComponentLink1Description=http://static.tme.eu/products_pics/6/6/c/66cc5cd64257edd80ca8e9fd2040972d/56038.jpg, ComponentLink1URL=http://static.tme.eu/products_pics/6/6/c/66cc5cd64257edd80ca8e9fd2040972d/56038.jpg, MinAmount=100, Mounting=SMD, Multiples=100, Price Type=NET, Pricing 1="100=0.00566, 1000=0.0034, 5000=0.00111, 15000=0.00102, 50000=0.00088 (EUR)", Stock 1=6800, SuppliedAmount=0, Supplier 1=TME, Unit=pcs, Weight=0.028
R4 R6 R17 R23: library part "Resistor 0805 56K", "Resistor", Coefficient de température="± 100", Manufacturer=MULTICOMP, Manufacturer Part Number=MC0.1W08051%56KFR, Resistor Mounting=CMS, Resistor Terminals="(Non Disponible)", Supplier Part Number 1=2129258, ComponentLink1Description=http://www.farnell.com/datasheets/1716700.pdf, ComponentLink1URL=http://www.farnell.com/datasheets/1716700.pdf, MSL="(Non Applicable)", Pricing 1="5000=0,001 (EUR)", Product Range="MULTICOMP - MC Series", Puissance=100, RoHS=YES, Résistance=56, Supplier 1=Farnell, Tension=150, Tolérance de résistance="± 1%", Type de boîtier de résistance=0805, Type de packaging="Full Reel", Type de résistance="Couche épaisse"
R7: library part "Resistor 0805 1.5K", "Resistor SMD 0805 1.5K", Case Code (Imperial)=0805, Case Code (Metric)=2012, Power Rating=125mW, Resistance=1.5kR, Supplier Part Number 1=2446909, Temperature Coefficient=100ppm/°C, Tolerance=1%, Voltage Rating=150V, Case/Package=0805, Composition="Thick Film", Mount="Surface Mount", Packaging="Tape and Reel", REACH SVHC=Unknown, Supplier 1=Farnell, Voltage Rating (DC)=150V
R9: library part "Resistor 0805 2.2K", "Resistor SMD 0805 2.2K", Manufacturer=BOURNS, Manufacturer Part Number=CR0805-FX-2201ELF, Supplier Part Number 1=2333585, ComponentLink1Description=http://www.bourns.com/engineering/CHPREZTR/cr0805.stp, ComponentLink1URL=http://www.bourns.com/engineering/CHPREZTR/cr0805.stp, ComponentLink2Description=http://www.farnell.com/datasheets/2178762.pdf, ComponentLink2URL=http://www.farnell.com/datasheets/2178762.pdf, Pricing 1="10=0.035, 100=0.0233, 500=0.0162, 1000=0.0141, 2500=0.012, 5000=0.0105, 25000=0.0065 (GBP)", RoHS=YES, Stock 1=2028, Supplier 1=Farnell
R10 R12: library part "Resistor 0805 10K", "Resistor SMD 0805 10K", Coefficient de température="± 100", Manufacturer=MULTICOMP, Manufacturer Part Number=MC0.1W08051%10KFR, Resistor Mounting=CMS, Supplier Part Number 1=2129195, ComponentLink1Description=http://www.farnell.com/datasheets/1716700.pdf, ComponentLink1URL=http://www.farnell.com/datasheets/1716700.pdf, MSL="MSL 1 - Illimité", Pricing 1="5000=0,001 (EUR)", Product Range="MULTICOMP - MC Series", Puissance=100, RoHS=YES, Résistance=10, Supplier 1=Farnell, Tension=150, Tolérance de résistance="± 1%", Type de boîtier de résistance=0805, Type de packaging="Full Reel", Type de résistance="Couche épaisse"
R11: library part "Resistor 0805 12K", "Resistor SMD 0805 12K", Manufacturer="Royal Electronic Factory", Manufacturer Part Number=0805S8J0123T5E, RoHS=Yes, RoHS Compliant=Yes
R15 R18 R20 R21: library part "Resistor 0805 0R", "Resistor or Jumper", Coefficient de température="-200ppm/°C à +400", Manufacturer=MULTICOMP, Manufacturer Part Number="MCMR08X000 PTL", Resistor Mounting=CMS, Supplier Part Number 1=2073603, ComponentLink1Description=http://www.farnell.com/datasheets/1716708.pdf, ComponentLink1URL=http://www.farnell.com/datasheets/1716708.pdf, MSL="MSL 1 - Illimité", Pricing 1="100=0,011, 500=0,009, 1000=0,008 (EUR)", Product Range="MULTICOMP - MCMR Series", Puissance=125, RoHS=YES, Résistance=0, Supplier 1=Farnell, Tension=150, Tolérance de résistance="± 0.05", Type de boîtier de résistance=0805, Type de packaging="Cut Tape", Type de résistance=Céramique
R16: library part "Resistor 0805 22K", "Resistor SMD 0805 22K", Manufacturer="Royal Electronic Factory", Manufacturer Part Number=0805S8J0223T5E, Supplier Part Number 1=SMD0805-22K, RoHS=Yes, RoHS Compliant=Yes, Supplier 1=TME
S1: "DIP Switch, 2 Position, SPST", LatestRevisionDate=17-Jul-2002, LatestRevisionNote="Re-released for DXP Platform.", PackageReference=DIP-4, Published=24-Mar-1999, Publisher="Altium Limited"
U1: "HALL EFFECT CURRENT SENSOR", Manufacturer="ALLEGRO MICROSYSTEMS", Manufacturer Part Number=ACS712ELCTR-20A-T, Supplier Part Number 1=ACS712ELCTR20AT, Température de travail=-40...85°C, Category="Capteurs de Hall", ComponentLink1Description=http://www.tme.eu/fr/details/acs712elctr20at/capteurs-de-hall/allegro-microsystems/acs712elctr-20a-t/, ComponentLink1URL=http://www.tme.eu/fr/details/acs712elctr20at/capteurs-de-hall/allegro-microsystems/acs712elctr-20a-t/, Courant d'entrée="± 20A", Fabricant="ALLEGRO MICROSYSTEMS", MinAmount=1, Multiples=1, Price Type=NET, Pricing 1="1=3,39, 3=3,16, 10=2,92 (EUR)", Stock 1=844, SuppliedAmount=10, Supplier 1=TME, Tension d'alimentation="8V DC", Type de capteur="Hall effet", Unit=pcs, Weight=0,336
U2: library part LM1117DT-ADJ, "800mA Adjustable low-Dropout Linear Regulator, 3-pin TO-252", ComponentLink1Description=http://www.ti.com/lit/ds/symlink/tlv1117.pdf, ComponentLink1URL=http://www.ti.com/lit/ds/symlink/tlv1117.pdf, ComponentLink2Description=http://www.farnell.com/cad/1614300.zip, ComponentLink2URL=http://www.farnell.com/cad/1614300.zip
U3: library part ESP32-WROOM-32x

## Via types
v1: diameter 50, hole 30, Top Layer to Bottom Layer, 118 vias

## Nets (pads, with @x,y where several pads share a name; then routed paths per layer and width w, separated by ;. In a path a pad name is that pad's centre, name@x,y a point inside that pad or via, vN(x,y) a via of type N, cw(c..) or ccw(c..) an arc to the next point about the centre after c; other vN are vias at no path point)
+5: C1.2 C5.1 D2.1 D3.2 D4.1 D5.2 D6.1 D8.1 D9.1 K1.2 K2.2 L1.1 PU1.4 U1.8 | length 7367.4
  Top Layer w20: U1.8 C1.2 925,944.37 925,1000 970,1045 970,1613.28 1011.72,1655 1518.28,1655 1530,1666.72 1530,1915 1505,1940 1505,2030.68 1493.28,2042.4 1385,2042.4 ; D5.2 1636.25,2013.75 1716.58,2013.75 D4.1 ; D3.2 1902.5,2782.5 1905,2780 ; D2.1 1905,2615 ; D9.1 2230,280 2285,335 2455,335 2464.97,325.03 2505.67,284.33 D8.1@2620,284.33
  Top Layer w50: K2.2 1385,2042.4 1390,2047.4 1390,2280.71 1419.29,2310 2420.79,2310 2485.04,2245.75 2485.63,2246.34 C5.1 ; K1.2 1242.4,2925 1620,2925 1675,2870 1904,2870 L1.1 1905,2780 1905,2615 1905,2474.29 1928.62,2450.67 C5.1@2485,2450.67 ; D5.2 1635,2050.71 1674.29,2090 1947.63,2090 1984.8,2052.83 PU1.4@1992.91,2052.83
  Bottom Layer w50: K2.2 1240.22,2047.62 1987.7,2047.62 PU1.4@1992.91,2052.83
BUSY: R11.2 U1.7 | length 2220.5
  Top Layer w10: U1.7 800.15,900.15 931.24,900.15 973.62,942.53 973.62,1020.34 990,1036.72 990,1476.57 1143.43,1630 1540,1630 1555,1645 1555,1918.28 1525,1948.28 1525,2185 1540,2200 1769.14,2200 1775,2205.86 R11.2
CTRL_MACHINE: Q1.1 R4.2 U3.10 | length 1717.8
  Top Layer w10: Q1.1@1656,2472.5 1656.1,2472.6 1739.03,2472.6 R4.2@1741,2470.63 ; R4.2 1740,2390.86 1745.86,2385 v1(2210,2385) ; v1(2530,2960) 2540,2960 2575,2995 U3.10
  Bottom Layer w10: v1(2210,2385) 2210,2999.14 2215.86,3005 2355.02,3005 2485,3005 v1(2530,2960)
CTRL_MAIN: Q2.1 R6.2 U3.8 | length 2506.3
  Top Layer w10: Q2.1@1675,1637.6 1720,1637.6 ; R6.2@1741,1635.63 1739.03,1637.6 1720,1637.6 ; v1(2090,1795) 1725.86,1795 1720,1789.14 1720,1637.6 ; v1(2520,3150) 2575,3095 U3.8
  Bottom Layer w10: v1(2090,1795) 2090,3129.14 2110.86,3150 v1(2520,3150)
EMPTY: C2.2 D1.3 R1.1 R2.1 S1.2 U3.9 | length 4973.1
  Top Layer w10: R2.1@755,3180 755,3173.95 761.67,3167.28 1427.21,3167.28 1650.9,2943.6 1970.53,2943.6 2020.34,2893.78 2020.34,2816.43 2066.77,2770 R1.1@2075.98,2770 ; C2.2@2075.98,2635 2075.98,2690 ; v1(2150,2690) 2075.98,2690 ; D1.3 2080.98,2770 2075.98,2765 2075.98,2690 ; v1(2525,3060) 2535.82,3060 2550.82,3045 U3.9 ; v1(3215,1325) 3215,1140 3220,1135 S1.2@3220,1090
  Bottom Layer w10: v1(2525,3060) 2340.02,3060 2330.02,3070 2155.86,3070 2150,3064.14 2150,2000.5 2305.5,1845 2695,1845 v1(3215,1325)
EN_2: C9.1 D7.1 D7.3 P5.1 R10.1 U3.3 | length 813.6
  Top Layer w10: C9.1 2430.69,2965 2442.4,2976.72 2442.4,3168.03 R10.1 2443.7,3170.67 2443.7,3303.7 D7.3 ; D7.1@2364.9,3342.4 D7.1 2439.14,3342.5 2445,3336.64 D7.3 ; U3.3 2520,3345 2480,3305 D7.3
GND: C1.1 C2.1 C3.2 C4.2 C5.2 C6.2 C7.2 C8.1 C9.2 C10.1 D1.1 P1.5 P4.2 P5.4 P6.3 P6.5 P6.7 P6.9 PU1.3 Q1.2 Q2.2 Q3.2 Q4.2 R4.1 R6.1 R8.1 R9.1 R16.2 R17.1 R23.1 S1.3 S1.4 U1.5 U3.1 U3.15 U3.38 U3.39 V1.1 V2.1 V3.1 V4.1 | length 2567
  Top Layer w20: U1.5 983.28,790 997.4,804.12 997.4,840 997.4,950.83 1001.18,954.61 1008.28,954.61 1020,966.32 1020,1478.28 1031.72,1490 1908.28,1490 ; U3.39@2865,3149 U3.39@2938,3149 ; U3.39@2938,3077 U3.39@2938,3149 ; U3.39@2938,3221 U3.39@2938,3149 ; U3.39@3011,3149 U3.39@2938,3149
  Bottom Layer w20: U3.39@2865,3149 U3.39@2938,3149 ; U3.39@2938,3077 U3.39@2938,3149 ; U3.39@2938,3221 U3.39@2938,3149 ; U3.39@3011,3149 U3.39@2938,3149
  Bottom Layer w50: PU1.3@2800,2052.83 PU1.3@2800,2245.75
  other v1: 2549.76,158.46 1980,170 2645,440 2805,440 3175,975 3365,985 3270,1295 3145,1300 3390,1300 1920,1565 2087.5,1565 2255,1565 2422.5,1565 2590,1565 2020.05,1686.33 2176.7,1686.33 2333.35,1686.33 2490,1686.33 2390,1810 2227.12,1813.21 1690,1845 1860,1860 2002.14,1895.86 2210,1990 2629.67,2148.69 2210,2225 1215,2295 2635,2315 1545,2395 1660,2395 3500,2465 2001.03,2583.87 3500,2612.5 1680,2625 2000,2705 3500,2760 2793.3,2883.75 2946.48,2890.56 3485,2985 2035,3085 3185,3115 1460,3195 2145,3240 3180,3310 495,3340 710,3340 925,3340 2160,3360 3089.45,3394.36 2795,3400 2950,3400 1460,3405 1690,3405
NetC3_1: C3.1 U1.6 | length 130.6
  Top Layer w10: U1.6 C3.1
NetC6_1: C6.1 L1.2 U2.3 | length 387.4
  Top Layer w10: U2.3@1781.9,3130 U2.3
  Top Layer w20: C6.1@1649.37,3138.86 C6.1 U2.3@1781.9,3130 ; L1.2 L1.2@1906,2990
  Top Layer w50: U2.3 1782.5,3020.29 1799.39,3003.4 1892.6,3003.4 L1.2
NetC10_2: C10.2 R11.1 R16.1 U3.6 | length 2180.4
  Top Layer w10: R16.1 1601.97,2157.6 1685,2157.6 R11.1@1773.03,2157.6 ; R11.1 R11.1@1773.03,2157.6 ; v1(2291.25,2071.25) 2290,2070 2090,2070 2002.4,2157.6 R11.1@1773.03,2157.6 ; v1(2305,2865) 2305,2920 2320,2935 2469.14,2935 2475,2940.86 2475,3189.14 2480.86,3195 U3.6
  Bottom Layer w10: v1(2291.25,2071.25) 2291.25,2840.43 2305,2854.18 v1(2305,2865)
NetD2_2: D2.2 R3.2 | length 90.8
  Top Layer w10: D2.2@1798.83,2615 1798.62,2615.22 1798.62,2703.25 R3.2@1800.37,2705
NetD3_1: D3.1 D3.3 K1.5 Q1.3 R3.1 | length 767.3
  Top Layer w10: K1.5 1245,2460 1570.14,2460 1576,2465.86 1576,2700 ; D3.3@1576,2745 1576,2700 ; R3.1@1721.63,2705 R3.1 1581,2705 1576,2700
NetD4_2: D4.2 R5.2 | length 80.9
  Top Layer w10: D4.2 1772.28,2014.88 1772.28,1937.09 R5.2
NetD5_1: D5.1 D5.3 K2.5 Q2.3 R5.1 | length 912.5
  Top Layer w10: K2.5@1236,1570 1589.14,1570 1595,1575.86 Q2.3 1595,1890 1620,1890 1635,1905 D5.1 ; D5.3 1592.5,1975 1630,1937.5 D5.1 ; R5.1@1696.63,1935 1638.5,1935 1636,1937.5 D5.1
NetD6_2: D6.2 R8.2 | length 215.6
  Top Layer w10: R8.2 2305.63,2691.18 2295,2680.55 2295,2511.44 2301.44,2505 D6.2@2310,2505
NetD8_2: D8.2 R13.2 | length 155.6
  Top Layer w10: R13.2 D8.2@2620,230
NetD9_2: D9.2 R19.2 | length 130.8
  Top Layer w10: R19.2 2147.4,228.03 2147.4,193.46 2170.86,170 2227.17,170 D9.2
NetF1_1: F1.1 PU1.2
  other v1: 2700,1030 2440,1035 1355,1040 1775,1040 2130,1045
NetF1_2: F1.2 P4.3
NetK1_1: K1.1 P1.2 | length 1140
  Top Layer w10: 320,2430 370,2430 442.5,2430 532.5,2520 ; 560,2585 560,2562.5 567.5,2555 532.5,2520 ; v1(560,2690) 716.92,2690 v1@721.92,2685 ; v1@862.5,2685 726.92,2685 v1@721.92,2685 ; 960,2690 955,2685 870,2685 868.75,2683.75 862.5,2690 726.92,2690 v1@721.92,2685 ; 532.5,2520 556.92,2520 v1@721.92,2685
  other v1: 370,2425 560,2425 560,2557.5 715,2690 870,2690 1025,2690 1180,2690
NetK1_3: K1.3 P1.3
  other v1: 385,2758.75 385,2920
NetK1_4: K1.4 P1.1
  other v1: 355,2235 560.18,2235 765.35,2235 905,2235 905,2455
NetK2_1: K2.1 P2.2 | length 689.4
  Top Layer w10: 577.5,1737.5 577.5,1677.5 v1(580,1675) ; v1(580,1805) 592.5,1817.5 895,1817.5 919.4,1817.5 970,1817.5 957.5,1805 746.25,1805 v1@745,1806.25
  other v1: 733.75,1806.25 887.5,1806.25 1041.25,1806.25 1195,1806.25
NetK2_3: K2.3 P2.3
  other v1: 405,1878.75 405,2040 560,2040 905,2040
NetK2_4: K2.4 P2.1
  other v1: 360,1430 565.18,1430 770.35,1430
NetP1_4: P1.4 R2.2 | length 837.4
  Top Layer w10: P1.4 146,2885 146,3049.85 263.43,3167.28 669.59,3167.28 676.26,3173.95 R2.2@676.26,3180
NetP3_1: P3.1 P3.2 U1.3 U1.4 | length 266.5
  Top Layer w10: v1(435,670) 490,725 490,737.5 ; v1(435,806.25) 435,792.5 490,737.5 ; v1(555,690) 507.5,737.5 490,737.5
  other v1: 340,543.75 450,548.75 340,705
NetP3_3: P3.3 P3.4 U1.1 U1.2 | length 235.5
  Top Layer w10: 320,1087.5 502.5,1087.5 v1(540,1050)
  other v1: 365,998.75 450,998.75 365,1160 450,1160 535,1160
NetP4_1: P4.1 PU1.1
  other v1: 1570,205 1290,215 1705,470 1780,740 2130,745
NetP5_6: P5.6 R12.1 S1.1 U3.25
NetP6_10: P6.10
NetQ3_1: Q3.1 R14.1 R17.2 | length 154
  Top Layer w10: R17.2 2422.4,453.03 2422.4,375.1 Q3.1 R14.1
NetQ3_3: Q3.3 R13.1 | length 66.9
  Top Layer w10: Q3.3 2387.6,292.4 2387.6,231.97 R13.1
NetQ4_1: Q4.1 R22.1 R23.2 | length 149
  Top Layer w10: R23.2@2110.37,460 2108.4,458.03 2108.4,380.1 2108.5,380 R22.1 R22.1@2176.63,380
NetQ4_3: Q4.3 R19.1 | length 69.1
  Top Layer w10: Q4.3@2071,300 2073.6,297.4 R19.1@2073.6,231.97
NetR7_1: R7.1 R9.2 U2.1 | length 246.3
  Top Layer w10: R9.2 1541.97,3307.4 1623.03,3307.4 R7.1 1626.97,3307.4 1779.3,3307.4 U2.1
NetR14_2: R14.2 U3.29 | length 3304.3
  Top Layer w10: R14.2 2854.14,375 2860,380.86 2860,519.14 2865.86,525 3004.14,525 3010,530.86 3010,2235 v1(3005,2240) ; v1(3110,3005) 3120.82,3005 3130.82,2995 U3.29
  Bottom Layer w10: v1(3005,2240) 3005,2430 3110,2535 v1(3110,3005)
NetR15_1: R15.1 U3.13 | length 125.6
  Top Layer w10: R15.1 U3.13
NetR18_1: R18.1 U3.16 | length 116.4
  Top Layer w10: U3.16 2800,2755.28 R18.1
NetR20_1: R20.1 U3.23
NetR21_1: R21.1 U3.14
NetR22_2: R22.2 U3.24 | length 3310
  Top Layer w10: R22.2 2254.37,534.14 2260.23,540 2984.14,540 2990,545.86 2990,2150.15 2940,2200.15 v1(2940,2295) ; v1(3050,2650) 3050.29,2649.71 3180.8,2649.71 3200,2668.91 3200,2755.28 U3.24
  Bottom Layer w10: v1(2940,2295) 2940,2410.5 3050,2520.5 v1(3050,2650)
NetU3_4: U3.4
NetU3_5: U3.5
NetU3_7: U3.7
NetU3_11: U3.11
NetU3_12: U3.12
NetU3_17: U3.17
NetU3_18: U3.18
NetU3_19: U3.19
NetU3_20: U3.20
NetU3_21: U3.21
NetU3_22: U3.22
NetU3_26: U3.26
NetU3_27: U3.27
NetU3_28: U3.28
NetU3_30: U3.30
NetU3_31: U3.31
NetU3_32: U3.32
NetU3_33: U3.33
NetU3_36: U3.36
NetU3_37: U3.37
RX_2: P5.5 U3.34
TCK_2: P6.4 R18.2 | length 1290.8
  Top Layer w10: R18.2 R18.2@2801.97,2562.6 ; R18.2@2800.98,2561.61 R18.2@2801.97,2562.6 ; v1(3200,2320) 2957.4,2562.6 R18.2@2801.97,2562.6
  Bottom Layer w10: v1(3200,2320) 3579.14,2320 3585,2314.14 3585,2100.86 3579.14,2095 P6.4@3400,2095
TDI_2: P6.8 R21.2 | length 7.1
  Top Layer w10: P6.8@3400,1895 P6.8@3405,1890
TDO_2: P6.6 R20.2
TMS_2: P6.2 R15.2 | length 1625.1
  Top Layer w10: R15.2 2435.63,2605.86 2449.15,2592.34 2818.75,2592.34 2832.27,2578.82 3254.12,2578.82 3275.31,2600 3394.14,2600 3400,2594.14 P6.2@3400,2195
TX_2: P5.3 U3.35
VCC: C4.1 C7.1 C8.2 D1.2 D7.2 P5.2 P6.1 R1.2 R7.2 R10.2 R12.2 U2.2 U2.4 U3.2 | length 4577.1
  Top Layer w20: C4.1 1613.28,3270 1625,3258.28 R7.2 1690,3230.63 1700.63,3220 U2.2 2026.9,3220 U2.4 2027.5,3410.71 2056.79,3440 2270.89,3440 ; R1.2@2076.97,2846.77 2231.77,2846.77 2235,2850 ; v1(2343.8,2570) 2345,2571.2 2345,2793.28 2333.28,2805 2237.5,2805 D1.2 2235,2850 ; U3.2 2530,3395 2485,3440 2270.89,3440 ; R12.2 3298.19,2560.63 3300,2558.82 P6.1@3300,2195 ; 2235,2850 2250,2865 2250,3050 2265,3065 2284.8,3065 2287.09,3067.28 2287.09,3168.35 2288.74,3170 R10.2 2366.3,3170.67 2366.3,3266.2 D7.2 2302.5,3267.5 2270.89,3299.11 2270.89,3440
  Bottom Layer w20: v1(2343.8,2570) 2585,2570 2660,2495 2878.28,2495 2890,2483.28 2890,2171.72 2901.72,2160 3083.36,2160 3118.36,2195 P6.1@3300,2195

## Polygon pours and split planes (outlines as drawn)
GND on Bottom Layer "NONET_L02_P001" (solid, shelved, pour order 1): 0,0 0,375 445,375 445,70 1890,70 1890,540 2950,540 2950,1480 1475,1480 1475,2125 1105,2125 1105,2495 1515,2495 1515,3090 0,3090 0,3550 2600,3550 2600,3490 3350,3490 3350,3550 3725,3550 3725,0
GND on Top Layer "NONET_L01_P000" (solid, remove dead copper, shelved, pour order 0): 0,-5 0,375 445,375 445,70 1890,70 1890,540 2950,540 2950,1475.15 1480,1475 1480,2120 1105,2120 1105,2495 1515,2495 1515,3085 0,3085 0,3545 2600,3545 2600,3495 3350,3495 3350,3545 3725,3545 3725,-5

## Keep-outs
Keep-Out Layer:
  lines w1: 0,5 0,0 ; 1080,1300 1080,700 ; 1120,1300 1120,700 ; 0,0 0,3550 2600,3550 2600,3490 3350,3490 3350,3550 3725,3550 3725,0 0,0 ; 655,700 655,1300 ; 655,700 695,700 ; 655,700 665,700 685,700 695,700 ; 655,700 655,1300 ; 655,1300 695,1300 ; 655,1300 695,1300 ; 690,610 690,650 ; 690,610 1080,610 ; 690,610 1080,610 ; 690,610 690,650 ; 690,650 1080,650 ; 690,650 1080,650 ; 695,700 695,1300 ; 695,700 695,1300 ; 1080,610 1080,650 ; 1080,610 1080,650 ; 1080,700 1120,700 ; 1080,700 1080,1370 1120,1370 1120,700 ; 1080,700 1090,700 1110,700 1120,700 ; 880,1330 880,1670 920,1670 920,1330 880,1330 ; 950,1685 950,1725 1405,1725 1405,1685 950,1685 ; 1025,1930 1025,2545 1065,2545 1065,1930 1025,1930 ; 1025,2810 1025,3060 1065,3060 1065,2810 1025,2810 ; 1110,1915 1110,1955 1405,1955 1405,1915 1110,1915 ; 1110,2540 1110,2580 1405,2580 1405,2540 1110,2540 ; 1110,2805 1110,2845 1405,2845 1405,2805 1110,2805 ; 1160,1410 1160,1460 2855,1460 2855,1410 1160,1410 ; 1435,1740 1435,1895 1475,1895 1475,1740 1435,1740 ; 1435,2595 1435,2785 1475,2785 1475,2595 1435,2595 ; 1820,92.42 1820,555 1860,555 1860,92.42 1820,92.42 ; 1890,560 1890,600 2855,600 2855,560 1890,560 ; 2775,3045 2775,3245 2795,3245 2795,3045 2775,3045 ; 2810,2985 2810,3005 3060,3005 3060,2985 2810,2985 ; 2810,3290 2810,3310 3060,3310 3060,3290 2810,3290 ; 2920,625.17 2920,1370 2960,1370 2960,625.17 2920,625.17 ; 3070,3050 3070,3250 3090,3250 3090,3050 3070,3050

## Other copper
Top Layer:
  rectangle net NetP3_3: 25,850 270,1005
  rectangle net NetP3_3: 25,875 615,1300
  rectangle net NetP3_1: 25,410 525,795
  rectangle net NetP3_1: 365,620 615,855
  rectangle net NetK2_4: 675,1330 850,1670
  rectangle net NetK2_4: 580,1330 850,1550
  rectangle net NetK2_4: 25,1330 620,1550
  rectangle net NetK2_3: 25,1780 470,2055
  rectangle net NetK2_3: 365,1930 975,2130
  rectangle net NetK2_1: 510,1740 1405,1895
  rectangle net NetK2_1: 25,1580 560,1750
  rectangle net NetK2_1: 510,1580 645,1895
  rectangle net NetK1_4: 25,2080 340,2320
  rectangle net NetK1_4: 25,2165 900,2320
  rectangle net NetK1_4: 675,2165 975,2545
  rectangle net NetK1_3: 25,2535 370,2750
  rectangle net NetK1_3: 315,2535 455,3005
  rectangle net NetK1_3: 315,2810 975,3065
  rectangle net NetK1_1: 490,2595 1410,2785
  rectangle net NetK1_1: 25,2340 615,2520
  rectangle net NetK1_1: 490,2340 645,2770
  rectangle net GND: 775,35 885,295
  region net NetF1_1: 1160,940 1160,1370 2855,1370 2855,625 2545,625 2545,940
  region net NetF1_2: 580,90 580,580 1165,580 1165,785 1550,785 1550,340 745,340 745,90
  region net NetP4_1: 910,90 910,295 1605,295 1605,895 2455,895 2455,625 1795,625 1795,90
Bottom Layer:
  rectangle net NetP4_1: 910,90 1795,295
  rectangle net NetP4_1: 1605,90 1795,830
  rectangle net NetP4_1: 1605,625 2455,895
  rectangle net NetF1_2: 580,340 1550,580
  rectangle net NetF1_2: 580,90 745,415
  rectangle net NetF1_2: 1165,340 1550,785
  rectangle net NetF1_1: 2545,625 2855,1360
  rectangle net NetF1_1: 1160,940 2830,1370
  rectangle net GND: 15,2960 265,3195
  rectangle net GND: 775,45 885,295
  region net NetK1_1: 25,2520 490,2520 490,2785 1410,2785 1410,2595 645,2595 645,2340 25,2340
  region net NetK1_4: 25,2320 675,2320 675,2545 975,2545 975,2165 340,2165 340,2080 25,2080
  region net NetK2_3: 25,2055 365,2055 365,2130 975,2130 975,1930 470,1930 470,1780 25,1780
  region net NetK2_1: 25,1750 510,1750 510,1895 1405,1895 1405,1740 645,1740 645,1580 25,1580
  region net NetK2_4: 25,1550 675,1550 675,1670 850,1670 850,1330 25,1330
  region net NetP3_3: 25,1300 615,1300 615,875 270,875 270,850 25,850
  region net NetP3_1: 25,795 365,795 365,855 615,855 615,620 525,620 525,410 25,410
  region net NetK1_3: 25,2535 455,2535 455,2810 975,2810 975,3065 315,3065 315,2750 25,2750

## Silkscreen, mask and mechanical layers (free items; w line width, h text height)
Top Overlay:
  drawing of 20 lines, arcs and shapes, not listed
  text "BRA 2021 03 04" at 420,3430 h40
  text "2021 09" at 540.63,3245 h40
  text "GND" at 417,3072 h40 r270
  text "COMMAND" at 540.5,3021.5 h80
  text "LEVEL" at 417,2907 h40 r270
  text "NO" at 420,2640 h40 r270
  text "COM" at 417,2467 h40 r270
  text "NC" at 417,2242 h40 r270
  text "MAIN POWER" at 508.09,2132.8 h80
  text "CTRL" at 1085,2132.8 h80
  text "NO" at 400,1980 h40 r270
  text "COM" at 400,1705 h40 r270
  text "NC" at 414,1500 h40 r270
  text "BUSY I/O" at 413,1135 h40 r270
  text "BUSY I/O" at 413,732 h40 r270
  text "240V" at 664,543 h40 r270
  text "240V" at 969,543 h40 r270
  text "1A" at 1305,175 h60
Bottom Overlay:
  drawing of 15 lines, arcs and shapes, not listed
  text "BRA 2021 03 04" at 960,3430 h40
  text "2021 09" at 2730,1110 h40
Bottom Solder:
  lines w1: 950,1685 1405,1685 1405,1725 950,1725 950,1685 ; 1025,1930 1025,2545 1065,2545 1065,1930 1025,1930 ; 1110,1915 1405,1915 1405,1955 1110,1955 1110,1915 ; 1435,1740 1475,1740 1475,1895 1435,1895 1435,1740 ; 1435.85,2595 1475.85,2595 1475.85,2784.43 1435.85,2784.43 1435.85,2595

## Text inside footprints (layer, text, board x,y; h text height)
P1: Top Overlay "1" at 415.86,2108 h40 r270
P2: Top Overlay "1" at 412,1372 h40 r270
P3: Top Overlay "1" at 417,354 h40 r270
P4: Top Overlay "1" at 1065,390 h118.11; Mechanical 1 "1" at 1110,185 h118.11
P5: Top Overlay "1" at 3115,570 h60 r270
P6: Top Overlay "1" at 3055,2170 h60
PU1: Top Overlay "+" at 2455,2430 h78.74 r90; Top Overlay "-" at 2825,2430 h118.11 r90; Top Overlay "~" at 2400,573.32 h40 r180; Top Overlay "~" at 2675,573.32 h40 r180
U1: Top Overlay "1" at 610,985 h37.5